# Altium PCB lcd_ex.PcbDoc
Units mil, origin at the board's own origin, x right, y up, seen from the top; angles counter-clockwise.
Board outline 1020 x 1165 mil, 2 copper layers (Top Layer, Bottom Layer); 7 components, 45 nets, 110 pads, 26 vias.
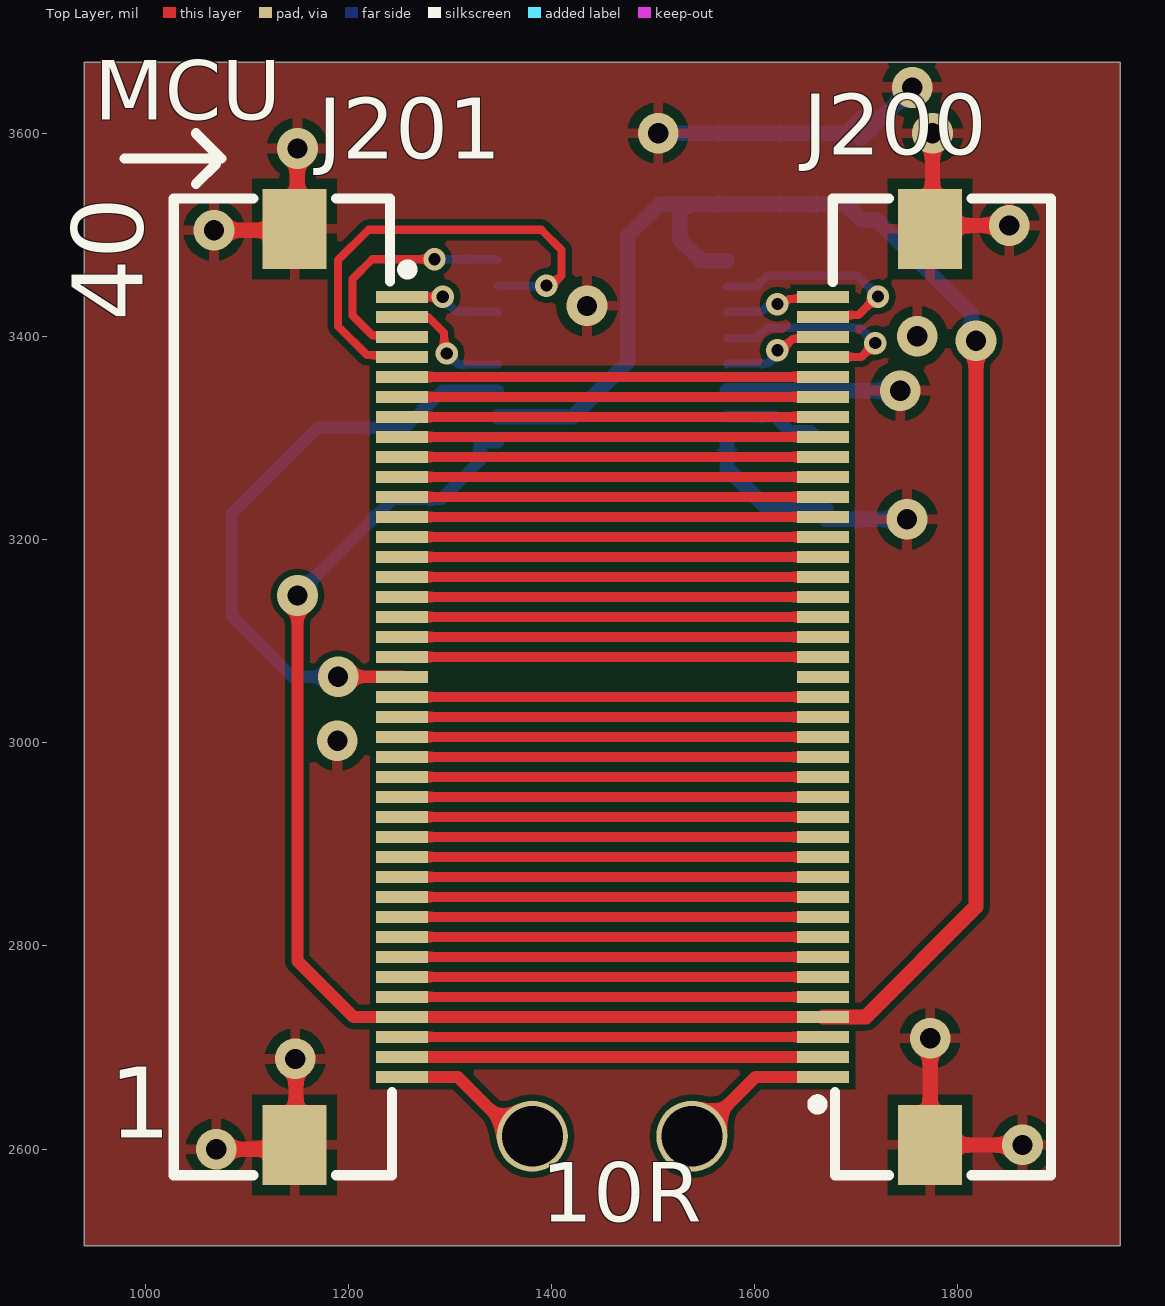
[diagram p0: Top Layer view]
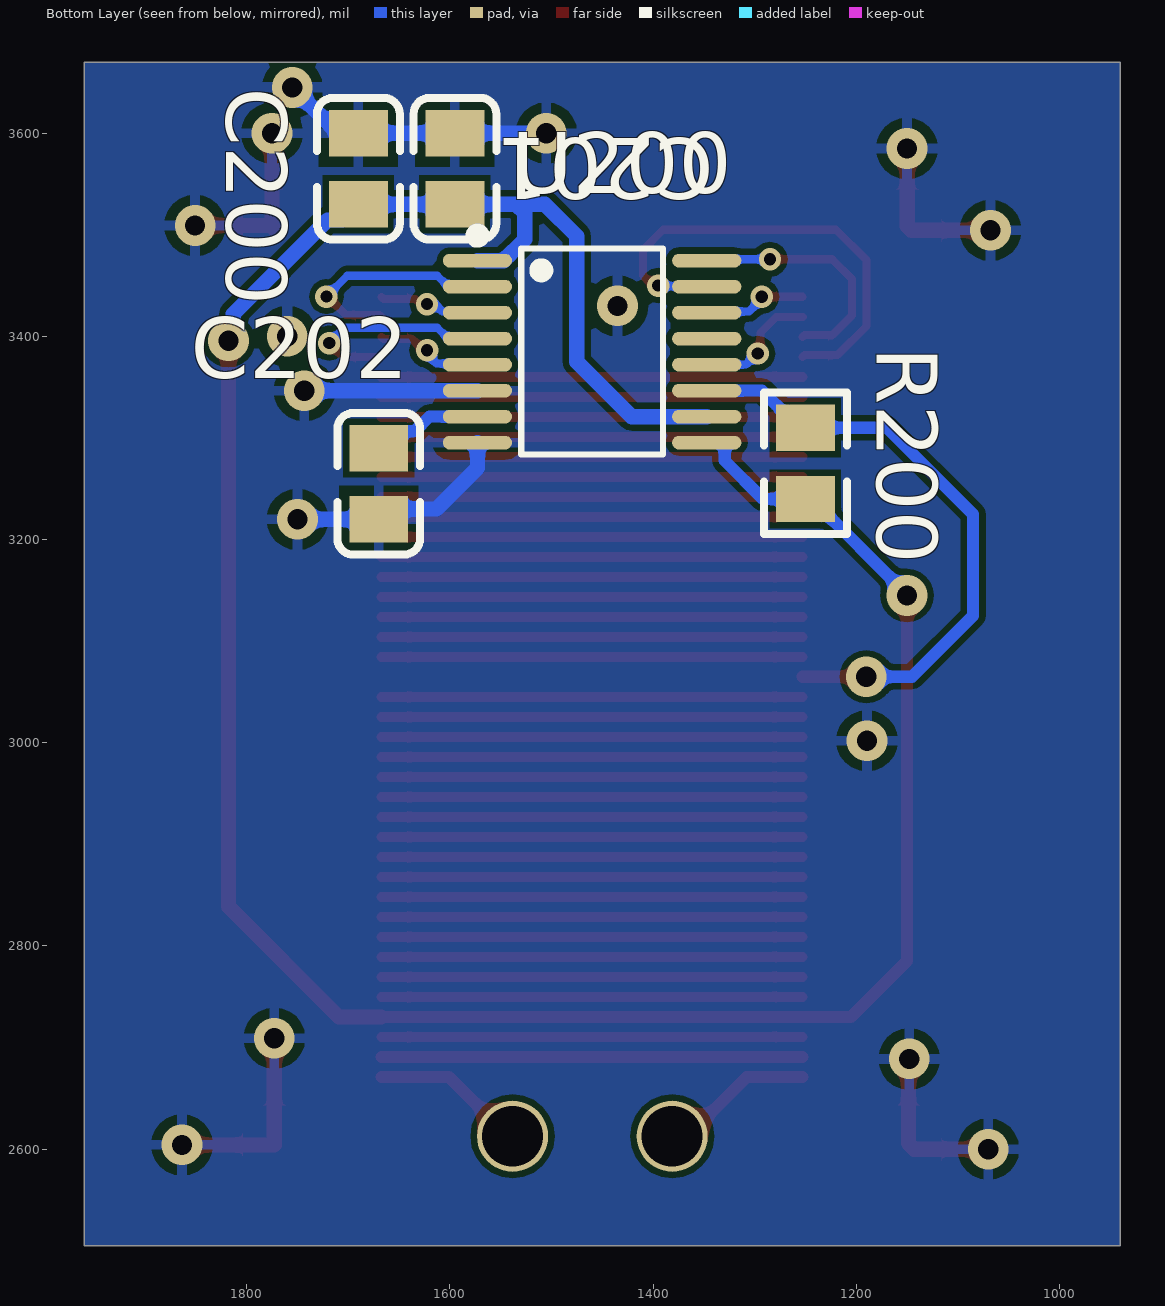
[diagram p1: Bottom Layer view, seen from below]
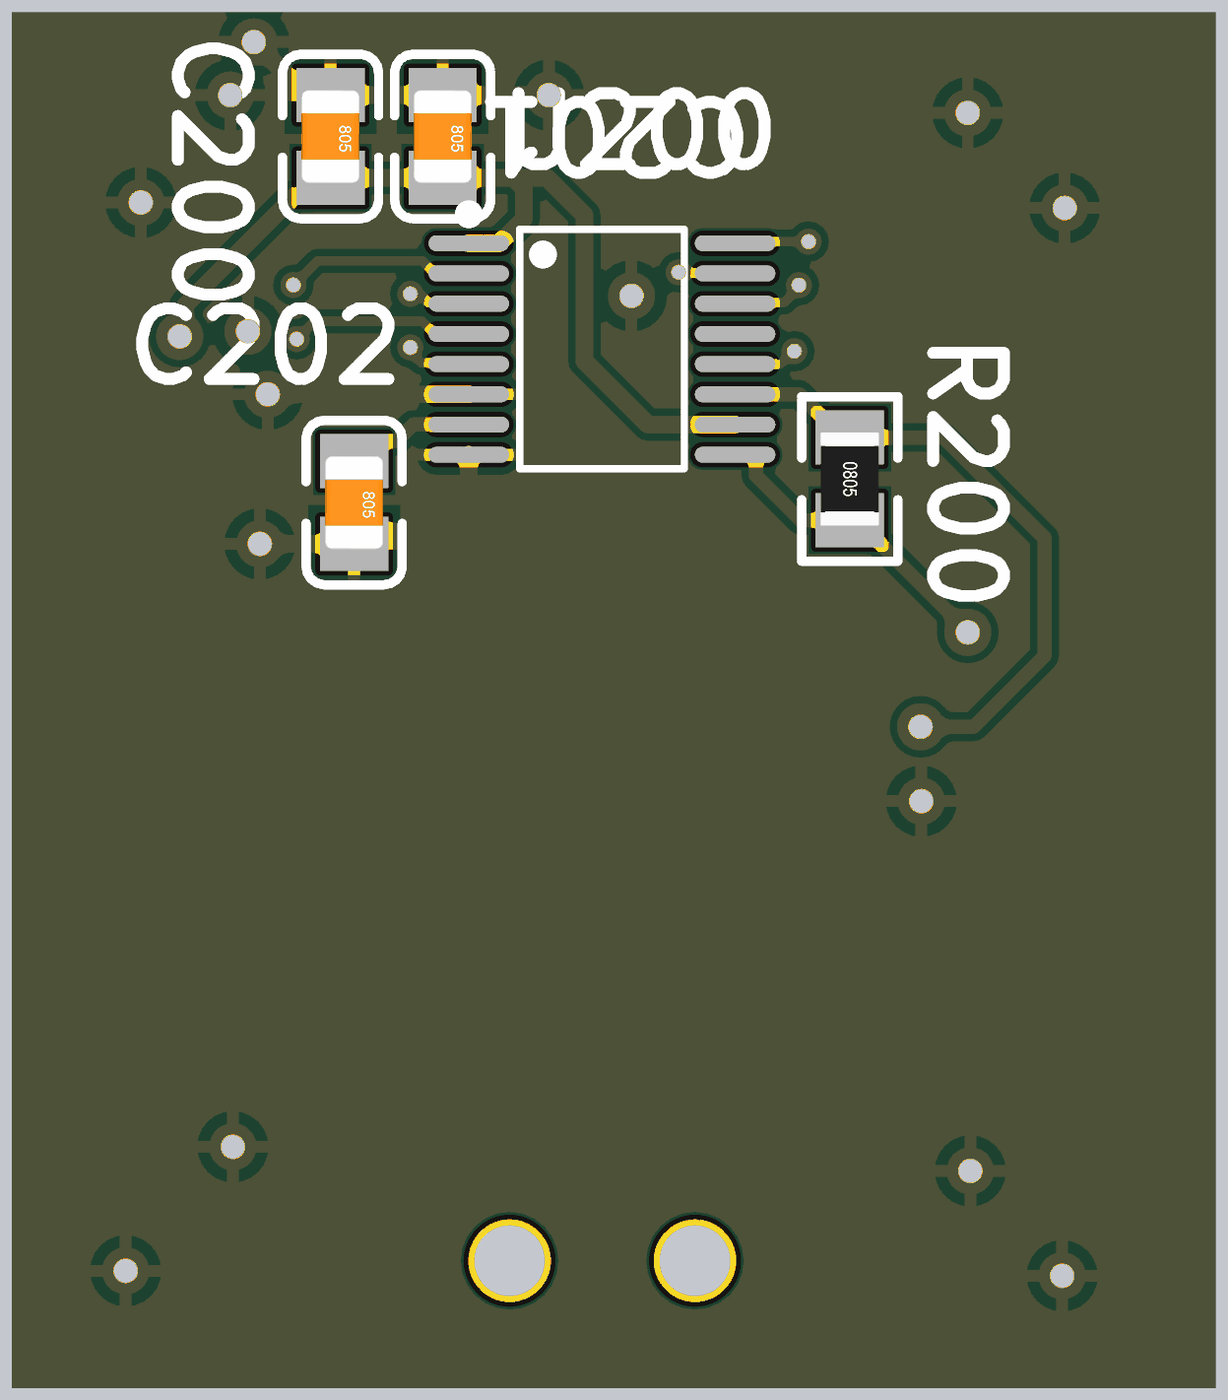
[diagram p2: 3D render of the assembled board from below, using the file's embedded part models]

## Layer stack, top to bottom
Top Solder: solder mask 0.4, Solder Resist, Dk 3.5
Top Layer: signal copper 1.4
Dielectric 1: dielectric 12.6, FR-4, Dk 4.8
Bottom Layer: signal copper 1.4
Bottom Solder: solder mask 0.4, Solder Resist, Dk 3.5

## Board outline
940,2505 940,3670 1960,3670 1960,2505

## Design rules (kind name [scope] priority, off if disabled: settings)
Clearance [All] p1: gap=6 ignorepadtopadclearanceinfootprint=FALSE
PolygonConnect [All] p1: connectstyle=Relief reliefconductorwidth=10 reliefentries=4 polygonreliefangle="90 Angle" airgapwidth=10
RoutingVias [All] p1: holewidth=28 width=50 viastyle="Through Hole" minholewidth=28 minwidth=50 maxholewidth=28 maxwidth=50
SolderMaskExpansion [All] p1: expansion=4 istentingtop=FALSE
Width [All] p1: maxlimit=15 minlimit=8 preferedwidth=10 minimp=50.000000 maximp=50.000000 favimp=50.000000
30 further rules are at their usual default settings.

## Components (designator, comment, footprint, x,y, rotation, side; value= is the part's Value field where it differs from the comment)
C200 "105" 0805_C 1690,3565 r270 bottom value=20pF
C201 "104" 0805_C 1595,3565 r270 bottom value=20pF
C202 "104" 0805_C 1670,3254.96 r270 bottom value=20pF
J200 "AFC01-S40FCA-00" FPC-SMD_AFC01-S40FCA-00 1720,3055 r90 top
J201 "AFC01-S40FCA-00" FPC-SMD_AFC01-S40FCA-00 1200,3055 r270 top
R200 "100K" 0805_R 1250,3275 r270 bottom value=10kΩ
U200 "XPT2046" TSSOP-16_L5.0-W4.4-P0.65-LS6.4-BL 1460,3385 r270 bottom

## Footprints (in the part's own frame and the unit in brackets; to place one, negate y for a bottom-side part, rotate by r counter-clockwise, add the part's x,y. Pads: shape width x height; smd on the part's side, far side on the other; paste and mask are expansions set on the pad)
0805_C [mm]
  rect 1.16x1.47 smd: 1(-0.89,0) 2(0.89,0)
  silkscreen extent -1.77,-1.04 1.77,1.04, body extent -1,-0.63 1,0.62, height 0.77
0805_R [mm]
  rect 1.16x1.47 smd: 1(-0.89,0) 2(0.89,0)
  silkscreen extent -1.77,-1.04 1.77,1.03, body extent -1,-0.63 1,0.62, height 0.49
FPC-SMD_AFC01-S40FCA-00 [mm]
  rect 0.3x1.3 smd: 1(-9.75,1.34) 2(-9.25,1.338) 3(-8.75,1.34) 4(-8.25,1.34) 5(-7.75,1.34) 6(-7.25,1.34) 7(-6.75,1.34) 8(-6.25,1.34) 9(-5.75,1.34) 10(-5.25,1.34) 11(-4.75,1.34) 12(-4.25,1.34) 13(-3.75,1.34) 14(-3.25,1.34) 15(-2.75,1.34) 16(-2.25,1.34) 17(-1.75,1.34) 18(-1.25,1.34) 19(-0.75,1.34) 20(-0.25,1.34) 21(0.25,1.34) 22(0.75,1.34) 23(1.25,1.34) 24(1.75,1.34) 25(2.25,1.34) 26(2.75,1.34) 27(3.25,1.34) 28(3.75,1.34) 29(4.25,1.34) 30(4.75,1.34) 31(5.25,1.34) 32(5.75,1.34) 33(6.25,1.34) 34(6.75,1.34) 35(7.25,1.34) 36(7.75,1.34) 37(8.25,1.34) 38(8.75,1.34) 39(9.25,1.34) 40(9.75,1.34)
  rect 2x1.6 smd: 41(-11.45,-1.34) 42(11.45,-1.34)
  silkscreen extent -12.21,-4.36 12.21,1.6
TSSOP-16_L5.0-W4.4-P0.65-LS6.4-BL [mil]
  oval 13.5x68.17 smd: 1(-89.57,-112.83) 2(-63.98,-112.83) 3(-38.39,-112.83) 4(-12.79,-112.83) 5(12.8,-112.83) 6(38.39,-112.83) 7(63.98,-112.83) 8(89.57,-112.83) 9(89.57,112.83) 10(63.98,112.83) 11(38.39,112.83) 12(12.8,112.83) 13(-12.79,112.83) 14(-38.39,112.83) 15(-63.98,112.83) 16(-89.57,112.83)
  silkscreen extent -120,-119 101,70

## Part data
C200 C201 C202: library part 0402C_104, "电容100nf", JLCPCB Part Class="Basic Part", LCSC Part Name="20pF ±5% 50V", Manufacturer=FH(风华), Manufacturer Part=0402CG200J500NT, Temperature Coefficient=C0G, Tolerance=±5%, Voltage Rated=50V, Add into BOM=yes, Convert to PCB=yes, Datasheet=https://atta.szlcsc.com/upload/public/pdf/source/20170923/C1554_1506149268708988361.pdf, Device=0402CG200J500NT, Name=20pF, Supplier=LCSC, Supplier Footprint=0402, Supplier Part=C1554, Symbol=0402CG200J500NT
J200 J201: "FPC", JLCPCB Part Class="Extended Part", LCSC Part Name="间距:0.5mm P数:40P 翻盖式 下接", Manufacturer=JS(钜硕电子), Add into BOM=yes, Contact Type=下接, Convert to PCB=yes, Datasheet=https://item.szlcsc.com/datasheet/AFC01-S40FCA-00/253933.html, Device=AFC01-S40FCA-00, FFC, FCB Thickness=0.3mm, Height Above Board=2mm, Locking Feature=翻盖式, Manufacturer Part=AFC01-S40FCA-00, Mounting Type=卧贴, Number of Contacts=40P, Pitch=0.5mm, Supplier=LCSC, Supplier Footprint=SMD,P=0.5mm,卧贴, Supplier Part=C262674, Symbol=AFC01-S40FCA-00
R200: library part 0402WGF1003TCE, "电阻100K", JLCPCB Part Class="Basic Part", LCSC Part Name="10kΩ ±1% 62.5mW", Manufacturer=UNI-ROYAL(厚声), Manufacturer Part=0402WGF1002TCE, Operating Temperature Range=-55℃~+155℃, Overload Voltage (Max)=50V, Power(Watts)=62.5mW, Temperature Coefficient=±100ppm/℃, Tolerance=±1%, Add into BOM=yes, Convert to PCB=yes, Datasheet=https://atta.szlcsc.com/upload/public/pdf/source/20200306/C422600_1E6D84923E4A46A82E41ADD87F860B5C.pdf, Device=0402WGF1002TCE, Name=10kΩ, Supplier=LCSC, Supplier Footprint=0402, Supplier Part=C25744, Symbol=0402WGF1002TCE, Type=厚膜电阻
U200: JLCPCB Part Class="Extended Part", Manufacturer=XPT(矽普特), Add into BOM=yes, Convert to PCB=yes, Datasheet=https://item.szlcsc.com/datasheet/XPT2046/19779.html, Device=XPT2046, Interface=-, LCSC Part Name=XPT2046, Manufacturer Part=XPT2046, Supplier=LCSC, Supplier Footprint=TSSOP-16, Supplier Part=C19076, Symbol=XPT2046, Touch Screen Type=-

## Free pads (board coordinates)
  round 70 hole 60: 2(1381.17,2612.75) 2(1538.28,2612.75)

## Via types
v1: diameter 40, hole 20, Top Layer to Bottom Layer, tented both sides, 18 vias
v2: diameter 22, hole 12, Top Layer to Bottom Layer, tented both sides, 8 vias

## Nets (pads, with @x,y where several pads share a name; then routed paths per layer and width w, separated by ;. In a path a pad name is that pad's centre, name@x,y a point inside that pad or via, vN(x,y) a via of type N, cw(c..) or ccw(c..) an arc to the next point about the centre after c; other vN are vias at no path point)
GND: C200.1 C201.1 C202.2 J200.41 J200.42 J201.41 J201.42 U200.6 U200.8 | length 1378.2
  Top Layer w15: v1(1067.84,3504.41) 1145.87,3504.41 J201.41 1149.87,3508.41 1149.87,3584.87 v1(1150,3585) ; v1(1070,2600) 1143.03,2600 J201.42 1148.54,2605.51 1148.54,2688.15 v1(1147.85,2688.85) ; v1(1772.76,2709.24) J200.41 v1(1863.6,2604.22) ; J200.42 J200.42@1775,3508.03 ; v1(1775,3600) J200.42@1775,3508.03 ; v1(1850.75,3509.12) 1776.09,3509.12 J200.42@1775,3508.03
  Bottom Layer w15: v1(1505,3600) 1525,3600 1525.04,3600.04 C201.1 C200.1 1705,3615.04 1705,3595 v1(1755,3645) ; U200.8 1572.83,3270.48 1613.14,3230.16 C202.2@1670,3230.16 ; U200.6 v1(1743.22,3346.61) ; C202.2 v1(1749.92,3219.92) v1@1750,3220
  other v1: 1189.35,3002.02 1760,3400 1435,3430
NetC202_1: C202.1 U200.7 | length 95.5
  Bottom Layer w12: U200.7 1620.17,3321.02 1634.35,3306.83 1655.25,3306.83 C202.1@1660.37,3301.72
NetJ200_2: J200.2 J201.39 | length 414.5
  Top Layer w12: J201.39 J200.2
NetJ200_3: J200.3 J201.38 | length 414.5
  Top Layer w10: J201.38 J200.3
NetJ200_5: J200.5 J201.36 | length 414.5
  Top Layer w10: J201.36 J200.5
NetJ200_6: J200.6 J201.35 | length 414.5
  Top Layer w10: J201.35 J200.6
NetJ200_7: J200.7 J201.34 | length 414.5
  Top Layer w10: J201.34 J200.7
NetJ200_8: J200.8 J201.33 | length 414.5
  Top Layer w10: J201.33 J200.8
NetJ200_9: J200.9 J201.32 | length 414.5
  Top Layer w10: J201.32 J200.9
NetJ200_10: J200.10 J201.31 | length 829
  Top Layer w10: J201.31 J200.10 J201.31
NetJ200_11: J200.11 J201.30 | length 414.5
  Top Layer w10: J201.30 J200.11
NetJ200_12: J200.12 J201.29 | length 414.5
  Top Layer w10: J201.29 J200.12
NetJ200_13: J200.13 J201.28 | length 414.5
  Top Layer w10: J201.28 J200.13
NetJ200_14: J200.14 J201.27 | length 414.5
  Top Layer w10: J201.27 J200.14
NetJ200_15: J200.15 J201.26 | length 414.5
  Top Layer w10: J201.26 J200.15
NetJ200_16: J200.16 J201.25 | length 414.5
  Top Layer w10: J201.25 J200.16
NetJ200_17: J200.17 J201.24 | length 414.5
  Top Layer w10: J201.24 J200.17
NetJ200_18: J200.18 J201.23 | length 414.5
  Top Layer w10: J201.23 J200.18
NetJ200_19: J200.19 J201.22 | length 414.5
  Top Layer w10: J201.22 J200.19
NetJ200_20: J200.20 J201.21 | length 414.5
  Top Layer w10: J201.21 J200.20
NetJ200_22: J200.22 J201.19 | length 414.5
  Top Layer w10: J201.19 J200.22
NetJ200_23: J200.23 J201.18 | length 414.5
  Top Layer w10: J201.18 J200.23
NetJ200_24: J200.24 J201.17 | length 414.5
  Top Layer w10: J201.17 J200.24
NetJ200_25: J200.25 J201.16 | length 414.5
  Top Layer w10: J201.16 J200.25
NetJ200_26: J200.26 J201.15 | length 414.5
  Top Layer w10: J201.15 J200.26
NetJ200_27: J200.27 J201.14 | length 414.5
  Top Layer w10: J201.14 J200.27
NetJ200_28: J200.28 J201.13 | length 414.5
  Top Layer w10: J201.13 J200.28
NetJ200_29: J200.29 J201.12 | length 414.5
  Top Layer w10: J201.12 J200.29
NetJ200_30: J200.30 J201.11 | length 414.5
  Top Layer w10: J201.11 J200.30
NetJ200_31: J200.31 J201.10 | length 414.5
  Top Layer w10: J201.10 J200.31
NetJ200_32: J200.32 J201.9 | length 414.5
  Top Layer w10: J201.9 J200.32
NetJ200_33: J200.33 J201.8 | length 414.5
  Top Layer w10: J201.8 J200.33
NetJ200_34: J200.34 J201.7 | length 414.5
  Top Layer w10: J201.7 J200.34
NetJ200_35: J200.35 J201.6 | length 414.5
  Top Layer w10: J201.6 J200.35
NetJ200_36: J200.36 J201.5 | length 414.5
  Top Layer w10: J201.5 J200.36
T_CLK: J201.3 U200.16 | length 244.9
  Top Layer w8: J201.3 1250.85,3401.39 1223.25,3401.39 1204.16,3420.49 1204.16,3456.4 1223.66,3475.91 v2(1284.91,3475.91)
  Bottom Layer w8: v2(1284.91,3475.91) 1345.84,3475.91 U200.16
T_CS: J201.4 U200.15 | length 473.4
  Top Layer w8: J201.4 1250.85,3381.71 1218.29,3381.71 1190,3410 1190,3475 1220,3505 1390,3505 1410,3485 1410,3460 1400,3450 v2(1395,3450)
  Bottom Layer w8: U200.15 1347.68,3449.49 1394.49,3449.49 v2(1395,3450)
T_MISO: J201.2 U200.12 | length 124.3
  Top Layer w8: J201.2 1278.7,3419.17 1294.32,3403.56 1294.32,3385.83 v2(1297,3383.15)
  Bottom Layer w8: v2(1297,3383.15) 1297.74,3383.15 1308.68,3372.2 U200.12
T_MOSI: J201.1 U200.14 | length 102.3
  Top Layer w8: J201.1 1252.88,3438.98 1292.95,3438.98 v2(1293.07,3439.1)
  Bottom Layer w8: v2(1293.07,3439.1) 1293.07,3436.93 1305.56,3424.44 1346.12,3424.44 U200.14
T_PEN: J201.20 R200.1 U200.11 | length 605.2
  Top Layer w12: v1(1190,3065) 1190.08,3064.92 1252.68,3064.92 J201.20
  Bottom Layer w12: v1(1190,3065) 1145,3065 1085,3125 1085,3225 1170.04,3310.04 R200.1 1256.1,3310.04 1292.67,3346.61 U200.11
VCCP: C200.2 C201.2 J200.4 J201.37 R200.2 U200.1 U200.9 U200.10 | length 2719.8
  Top Layer w12: v1(1150,3145) 1150,2785.26 1205.07,2730.2 J201.37 J200.4
  Top Layer w15: J200.4 1709.35,2730.2 1817.83,2838.68 v1(1817.83,3395.68)
  Bottom Layer w12: v1(1150,3145) 1150,3146.06 1243.9,3239.96 1291.71,3239.96 1329.45,3277.71 1329.45,3294.74 1330.15,3295.43 U200.9
  Bottom Layer w15: U200.10 1421.02,3321.02 1475,3375 1475,3498.54 1506.42,3529.96 1535.04,3529.96 ; U200.1 1546.99,3474.57 1526.25,3495.31 1526.25,3521.17 1535.04,3529.96 ; C200.2 1705.33,3514.63 1720.48,3514.63 1813.18,3421.93 1813.18,3400.33 v1(1817.83,3395.68) ; C200.2@1696.1,3529.96 C201.2 1535.04,3529.96
XL: J200.39 U200.2 | length 224.1
  Top Layer w8: J200.39 1669.15,3421.08 1702.27,3421.08 1720.38,3439.19 v2(1721.48,3439.19)
  Bottom Layer w8: U200.2 1601.65,3448.98 1612.4,3459.73 1700.94,3459.73 v2(1721.48,3439.19)
XR: J200.37 U200.4 | length 214
  Top Layer w8: J200.37 1705.11,3379.8 v2(1718.71,3393.4)
  Bottom Layer w8: U200.4 1601.65,3397.79 1612.4,3408.54 1703.57,3408.54 v2(1718.71,3393.4) v2@1718.71,3393.71
YD: J200.38 U200.5 | length 107.8
  Top Layer w8: v2(1622.37,3386.33) 1626.16,3386.33 1637.4,3397.58 1665.34,3397.58 J200.38
  Bottom Layer w8: U200.5 1573.88,3373.25 1613.25,3373.25 v2@1625,3385
YU: J200.40 U200.3 | length 100.8
  Top Layer w8: v2(1622.43,3431.74) 1625.11,3434.41 1631.46,3434.41 1634,3436.95 1665.34,3436.95 J200.40
  Bottom Layer w8: U200.3 1573.88,3424.44 1607.3,3424.44 1611.92,3429.06 1619.75,3429.06 v2(1622.43,3431.74)
pads on no net: J200.1 J200.21 J201.40 U200.13
copper on no net: | length 352
  Top Layer w12: 1252.76,2671.14 1307.86,2671.14 1369,2610 1400,2610 ; 1515,2610 1540.46,2610 ; 1538.28,2610.74 1540.46,2610.74 1600.87,2671.14 1667.24,2671.14

## Polygon pours and split planes (outlines as drawn)
GND on Bottom Layer "NONET_L04_P-001" (solid, remove dead copper, pour order 1): 940,3670 1960,3670 1960,2505 940,2505
GND on Top Layer "NONET_L04_P-001" (solid, remove dead copper, pour order 0): 940,3670 1960,3670 1960,2505 940,2505

## Silkscreen, mask and mechanical layers (free items; w line width, h text height)
Top Overlay:
  lines w10: 980,3575 1075,3575 1050,3600 1070,3580 1070,3570 1050,3550
  text "MCU" at 950.07,3594.24 h100
  text "40" at 1020.92,3415 h120 r90
  text "1" at 965,2588.08 h120
  text "10R" at 1390,2509.24 h100
Mechanical 1:
  the board outline again, w10